# EAGLE board IntegratedSensorV9 (EAGLE 7.1.0)
MenloSensor1
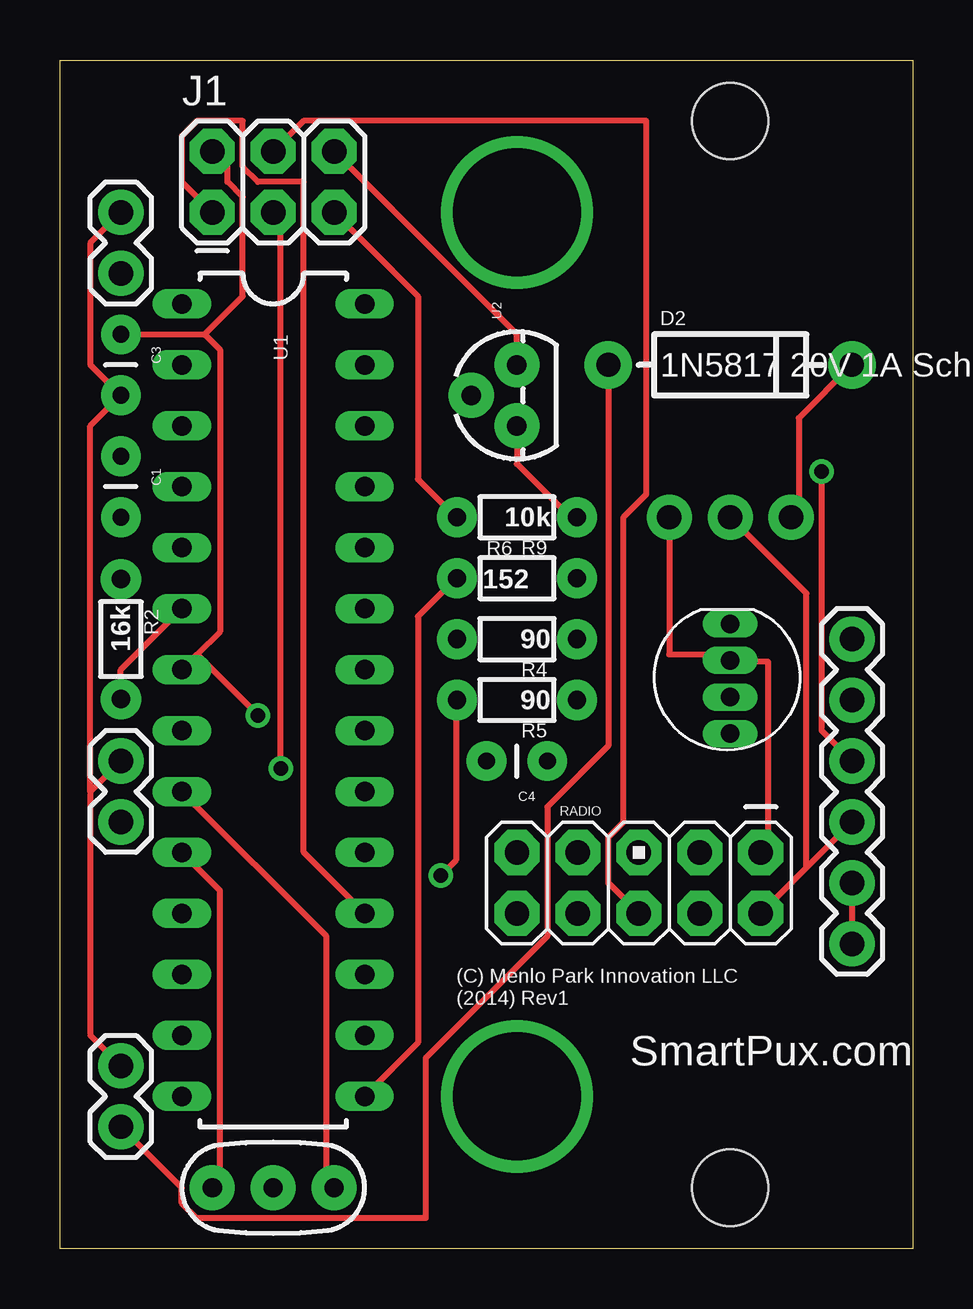
[diagram p0: board, top side]
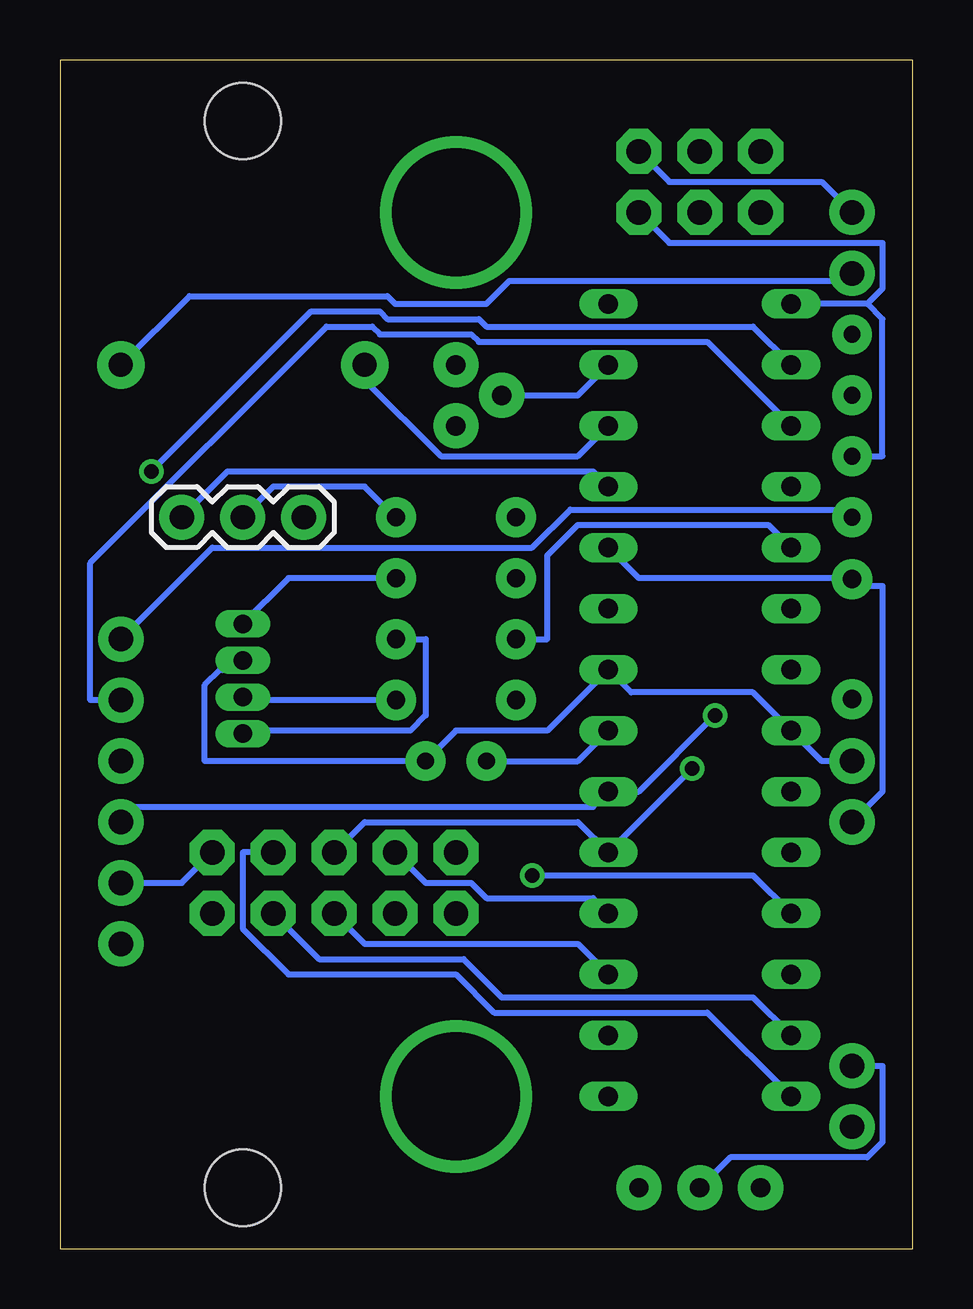
[diagram p1: board, bottom side, seen from below]

Size 35.56 x 49.53 mm. Coordinates in mm from the lower left corner, seen from the top.
Outline: 0,0 0,49.53 35.56,49.53 35.56,0 0,0
Copper layers (1*16): Top 0.035mm / dielectric 1.5mm / Bottom 0.035mm
Design rules "default *": minimum track width 10mil, minimum drill 24mil, track to track 8mil, track to pad 8mil, pad to pad 8mil, via to via 8mil, smd to smd 8mil, copper to edge 40mil, drill to drill 8mil, minimum pad ring 0mil, minimum via ring 8mil, stop-mask expansion 4mil, vias tented up to drill 0mil, thermal gap 10mil

## Footprints (pad centres in the part's own frame; a part is rotated, then mirrored left to right if it is on the bottom)
1X02 = drill 1.016 pad 1.88: 1 0,0; 2 2.54,0
CAP-PTH-SMALL = drill 0.7 pad 1.651: 1 0,0; 2 2.54,0
1X03 = drill 1.016 pad 1.88: 1 0,0; 2 2.54,0; 3 5.08,0
LED-RGB-THRU = drill 0.762 pad 0.889 long: 1 1.905,0; 2 0.381,0; 3 -1.143,0; 4 -2.667,0
DIODE-1N4001 = drill 1 pad 1.981: A -5.08,0; C 5.08,0
1X06 = drill 1.016 pad 1.88: 1 0,0; 2 2.54,0; 3 5.08,0; 4 7.62,0; 5 10.16,0; 6 12.7,0
PAD_0.2100 = drill 5.334 pad 5.334: 1 0,0
2X3 = drill 1.016 pad 1.88 octagon: 1 0,0; 2 0,2.54; 3 2.54,0; 4 2.54,2.54; 5 5.08,0; 6 5.08,2.54
1/6W-RES = drill 0.762 pad 1.676: 1 -2.5,0; 2 2.5,0
AVR_ICSP = drill 1.016 pad 1.88 octagon: 1 -1.27,5.08; 2 1.27,5.08; 3 -1.27,2.54; 4 1.27,2.54; 5 -1.27,0; 6 1.27,0; 7 -1.27,-2.54; 8 1.27,-2.54; 9 -1.27,-5.08; 10 1.27,-5.08
DIL28-3 = drill 0.813 long: 1 -16.51,-3.81; 2 -13.97,-3.81; 3 -11.43,-3.81; 4 -8.89,-3.81; 5 -6.35,-3.81; 6 -3.81,-3.81; 7 -1.27,-3.81; 8 1.27,-3.81; 9 3.81,-3.81; 10 6.35,-3.81; 11 8.89,-3.81; 12 11.43,-3.81; 13 13.97,-3.81; 14 16.51,-3.81; 15 16.51,3.81; 16 13.97,3.81; 17 11.43,3.81; 18 8.89,3.81; 19 6.35,3.81; 20 3.81,3.81; 21 1.27,3.81; 22 -1.27,3.81; 23 -3.81,3.81; 24 -6.35,3.81; 25 -8.89,3.81; 26 -11.43,3.81; 27 -13.97,3.81; 28 -16.51,3.81
TO-92 = drill 0.813 pad 1.88: 1 -1.27,0; 2 0,1.905; 3 1.27,0
DRILL_0.1250 = hole 3.175: 0,0
RESONATOR-PTH = drill 0.8 pad 1.88: 1 -2.54,0; 2 0,0; 3 2.54,0

## Placement (x,y rotation side)
BAT  [1X02]  2.54,40.64 90 top
C1  0.1uf  [CAP-PTH-SMALL]  2.54,33.02 270 top
C3  0.1uf  [CAP-PTH-SMALL]  2.54,38.1 270 top
C4  0.1uf  [CAP-PTH-SMALL]  20.32,20.32 180 top
CDS  [1X02]  2.54,20.32 270 top
CONVERTER  3pin  [1X03]  30.48,30.48 0 bottom
D1  LED-RGB-CC-THRUCLEAR  [LED-RGB-THRU]  27.94,24.13 90 top
D2  1N5817 20V 1A Schottky  [DIODE-1N4001]  27.94,36.83 0 top
FTDI  [1X06]  33.02,25.4 270 top
H1  SPECIAL_DRILL_0.2100  [PAD_0.2100]  19.05,43.18 0 top
H2  SPECIAL_DRILL_0.2100  [PAD_0.2100]  19.05,6.35 0 top
J1  AVR_SPI_PRG_6PTH  [2X3]  6.35,43.18 0 top
R2  16k  [1/6W-RES]  2.54,25.4 270 top
R4  90  [1/6W-RES]  19.05,25.4 180 top
R5  90  [1/6W-RES]  19.05,22.86 180 top
R6  152  [1/6W-RES]  19.05,27.94 0 top
R9  10k  [1/6W-RES]  19.05,30.48 180 top
RADIO  M05X2PTH  [AVR_ICSP]  24.13,15.24 270 top
SLR  [1X02]  2.54,5.08 90 top
U1  ATMEGA328P_PDIP  [DIL28-3]  8.89,22.86 270 top
U2  [TO-92]  19.05,35.56 90 top
U$2  [DRILL_0.1250]  27.94,2.54 0 top
U$3  [DRILL_0.1250]  27.94,46.99 0 top
Y2  8Mhz  [RESONATOR-PTH]  8.89,2.54 180 top

## Library data of the parts
BAT CDS CONVERTER FTDI J1 RADIO SLR = SparkFun-Connectors
C1 C3 C4 = SparkFun-Capacitors
D1 = SparkFun-LED-MenloFix; PROD_ID: DIO-08418
D2 = SparkFun-DiscreteSemi
H1 H2 U$2 U$3 = special-drill
R2 R4-R6 R9 = SparkFun-Resistors
U1 = SparkFun-DigitalIC
U2 = SparkFun-Sensors
Y2 = SparkFun-FreqCtrl

## Nets
A0_MOISTUREINPUT: U1.23
A1_LIGHTINPUT: CDS.2 R2.1 U1.24
A4_SDA_TEMP: U1.27 U2.2
A5_SCL: U1.28
BAT: BAT.1 CONVERTER.1 D2.C U1.25
CE_RADIO: RADIO.3 U1.14
CSN_RADIO: RADIO.4 U1.13
DIO3_BLUE: R4.2 U1.5
DIO4_SENSOR_POWER: R2.2 U1.6
DIO5_GREEN: R5.2 U1.11
DIO6_TEMP: U1.12
DIO9_RED: R6.1 U1.15
DIO10_SS: U1.16
GND: BAT.2 C3.2 C4.1 CDS.1 CONVERTER.3 D1.2 FTDI.5 FTDI.6 J1.6 RADIO.1 SLR.2 U1.8 U1.22 U2.3 Y2.2
IRQ: U1.4
MISO: J1.1 RADIO.7 U1.18
MOSI: J1.4 RADIO.6 U1.17
N$1: D1.4 R4.1
N$2: D1.3 R5.1
N$3: D1.1 R6.2
N$5: U1.9 Y2.1
N$6: U1.10 Y2.3
N$8: C4.2 U1.21
RESET: C1.1 J1.5 R9.2 U1.1
RTS#: C1.2 FTDI.1
RXD: FTDI.3 U1.2
SCK: J1.3 RADIO.5 U1.19
SOLAR_PLUS: D2.A SLR.1 U1.26
TXD: FTDI.2 U1.3
VCC: C3.1 CONVERTER.2 FTDI.4 J1.2 R9.1 RADIO.2 U1.7 U1.20 U2.1

## Tracks (layer width: path | path; a pad name or v marks a point on that pad's centre or on a via)
A1_LIGHTINPUT
  Bottom 0.254: U1.24 11.43,27.94 2.54,27.94 R2.1 2.54,27.62 1.27,27.62 1.27,19.05 CDS.2
A4_SDA_TEMP
  Bottom 0.254: U1.27 13.97,35.56 U2.2
BAT
  Top 0.254: CONVERTER.1 30.8,30.8 30.8,34.61 D2.C
  Bottom 0.254: U1.25 13.34,32.38 28.57,32.38 CONVERTER.1 | BAT.1 2.86,40.32 16.83,40.32 17.78,39.37 21.59,39.37 21.91,39.69 30.16,39.69 D2.C
CE_RADIO
  Bottom 0.254: U1.14 8.57,9.84 17.46,9.84 19.05,11.43 26.04,11.43 27.94,13.34 27.94,16.51 RADIO.3
CSN_RADIO
  Bottom 0.254: U1.13 6.67,10.48 17.14,10.48 18.73,12.06 24.77,12.06 RADIO.4
DIO3_BLUE
  Bottom 0.254: U1.5 6.03,30.16 13.97,30.16 15.24,28.89 15.24,25.4 R4.2
DIO4_SENSOR_POWER
  Top 0.254: U1.6 2.54,24.13 R2.2
DIO5_GREEN  (via drill 0.61)
  Top 0.254: v15.88,15.56 16.51,16.19 16.51,22.86 R5.2
  Bottom 0.254: U1.11 6.67,15.56 v15.88,15.56
DIO9_RED
  Top 0.254: U1.15 14.92,8.57 14.92,26.35 16.51,27.94 R6.1
GND
  Top 0.254: BAT.2 1.27,41.91 1.27,36.83 C3.2 1.27,34.29 1.27,19.05 | J1.6 19.05,38.1 U2.3 | CONVERTER.3 25.4,24.77 27.94,24.77 D1.2 27.94,24.45 29.53,24.45 29.53,16.83 RADIO.1 | FTDI.5 FTDI.6 | SLR.2 1.27,8.89 1.27,19.05 | CDS.1 1.27,19.05
  Bottom 0.254: BAT.2 3.81,44.45 10.16,44.45 J1.6 | RADIO.1 30.48,15.24 FTDI.5 | Y2.2 7.62,3.81 1.91,3.81 1.27,4.45 1.27,7.62 SLR.2 | CDS.1 3.81,20.32 U1.8 6.67,23.18 11.75,23.18 U1.22 15.24,21.59 19.05,21.59 C4.1 29.53,20.32 29.53,23.5 28.89,24.13 28.26,24.13 27.94,24.45 D1.2
MISO
  Top 0.254: J1.1 5.08,44.45 5.08,46.35 5.71,46.99 7.62,46.99 7.62,45.09 8.26,44.45 10.16,44.45 10.16,16.51 U1.18
  Bottom 0.254: U1.18 13.34,14.61 17.78,14.61 18.41,15.24 20.32,15.24 RADIO.7
MOSI
  Top 0.254: J1.4 10.16,46.99 24.45,46.99 24.45,31.43 23.5,30.48 23.5,17.78 22.86,17.14 22.86,15.24 RADIO.6
  Bottom 0.254: U1.17 13.97,12.7 22.86,12.7 RADIO.6
N$1
  Bottom 0.254: R4.1 20.32,25.4 20.32,22.23 20.95,21.59 27.94,21.59 D1.4
N$2
  Bottom 0.254: R5.1 27.94,22.86 D1.3
N$3
  Bottom 0.254: D1.1 26.04,27.94 R6.2
N$5
  Top 0.254: U1.9 11.11,13.02 11.11,2.86 Y2.1
N$6
  Top 0.254: U1.10 6.67,14.92 6.67,2.86 Y2.3
N$8
  Bottom 0.254: U1.21 13.97,20.32 C4.2
RESET
  Top 0.254: J1.5 14.92,39.69 14.92,32.07 16.51,30.48 R9.2
  Bottom 0.254: 1.91,39.37 U1.1 | 1.91,39.37 1.27,38.73 1.27,33.02 C1.1 | 1.91,39.37 1.27,40.01 1.27,41.91 10.16,41.91 J1.5
RTS#
  Bottom 0.254: C1.2 2.86,30.8 14.29,30.8 15.88,29.21 29.21,29.21 FTDI.1
RXD  (via drill 0.61)
  Top 0.254: v31.75,32.38 31.75,21.59 FTDI.3
  Bottom 0.254: U1.2 6.67,38.42 17.78,38.42 18.1,38.73 21.91,38.73 22.23,39.05 25.08,39.05 v31.75,32.38
SCK  (via drill 0.61)
  Top 0.254: J1.3 9.21,42.86 v9.21,20
  Bottom 0.254: RADIO.5 22.86,17.78 13.97,17.78 U1.19 v9.21,20
SOLAR_PLUS
  Top 0.254: SLR.1 5.08,2.54 5.08,1.91 5.71,1.27 15.24,1.27 15.24,7.94 20.32,13.02 20.32,18.41 22.86,20.95 D2.A
  Bottom 0.254: U1.26 13.97,33.02 19.68,33.02 22.86,36.2 D2.A
TXD
  Bottom 0.254: U1.3 8.57,37.78 18.1,37.78 18.41,38.1 22.23,38.1 22.54,38.42 24.45,38.42 34.29,28.57 34.29,22.86 FTDI.2
VCC  (via drill 0.61)
  Top 0.254: 5.71,24.77 6.67,25.72 6.67,37.47 6.03,38.1 | 5.71,24.77 U1.7 | C3.1 6.03,38.1 | J1.2 6.99,45.09 6.99,44.45 7.62,43.81 7.62,39.69 6.03,38.1 | U2.1 19.05,32.7 21.27,30.48 R9.1 | FTDI.4 31.11,15.88 | 31.11,15.88 RADIO.2 | CONVERTER.2 31.11,27.3 31.11,15.88 | v8.26,22.23 5.71,24.77
  Bottom 0.254: CONVERTER.2 26.67,31.75 22.86,31.75 21.59,30.48 R9.1 | FTDI.4 32.38,18.41 13.34,18.41 U1.20 11.43,19.05 v8.26,22.23

## Text on the board
tPlace: (C) Menlo Park Innovation LLC / (2014) Rev1 | SmartPux.com